# Altium PCB PCB1.PcbDoc
Units mil, origin at the board's own origin, x right, y up, seen from the top; angles counter-clockwise.
Board outline 6000 x 4000 mil, 2 copper layers (Top Layer, Bottom Layer); 9 components, 11 nets, 29 pads, 0 vias.
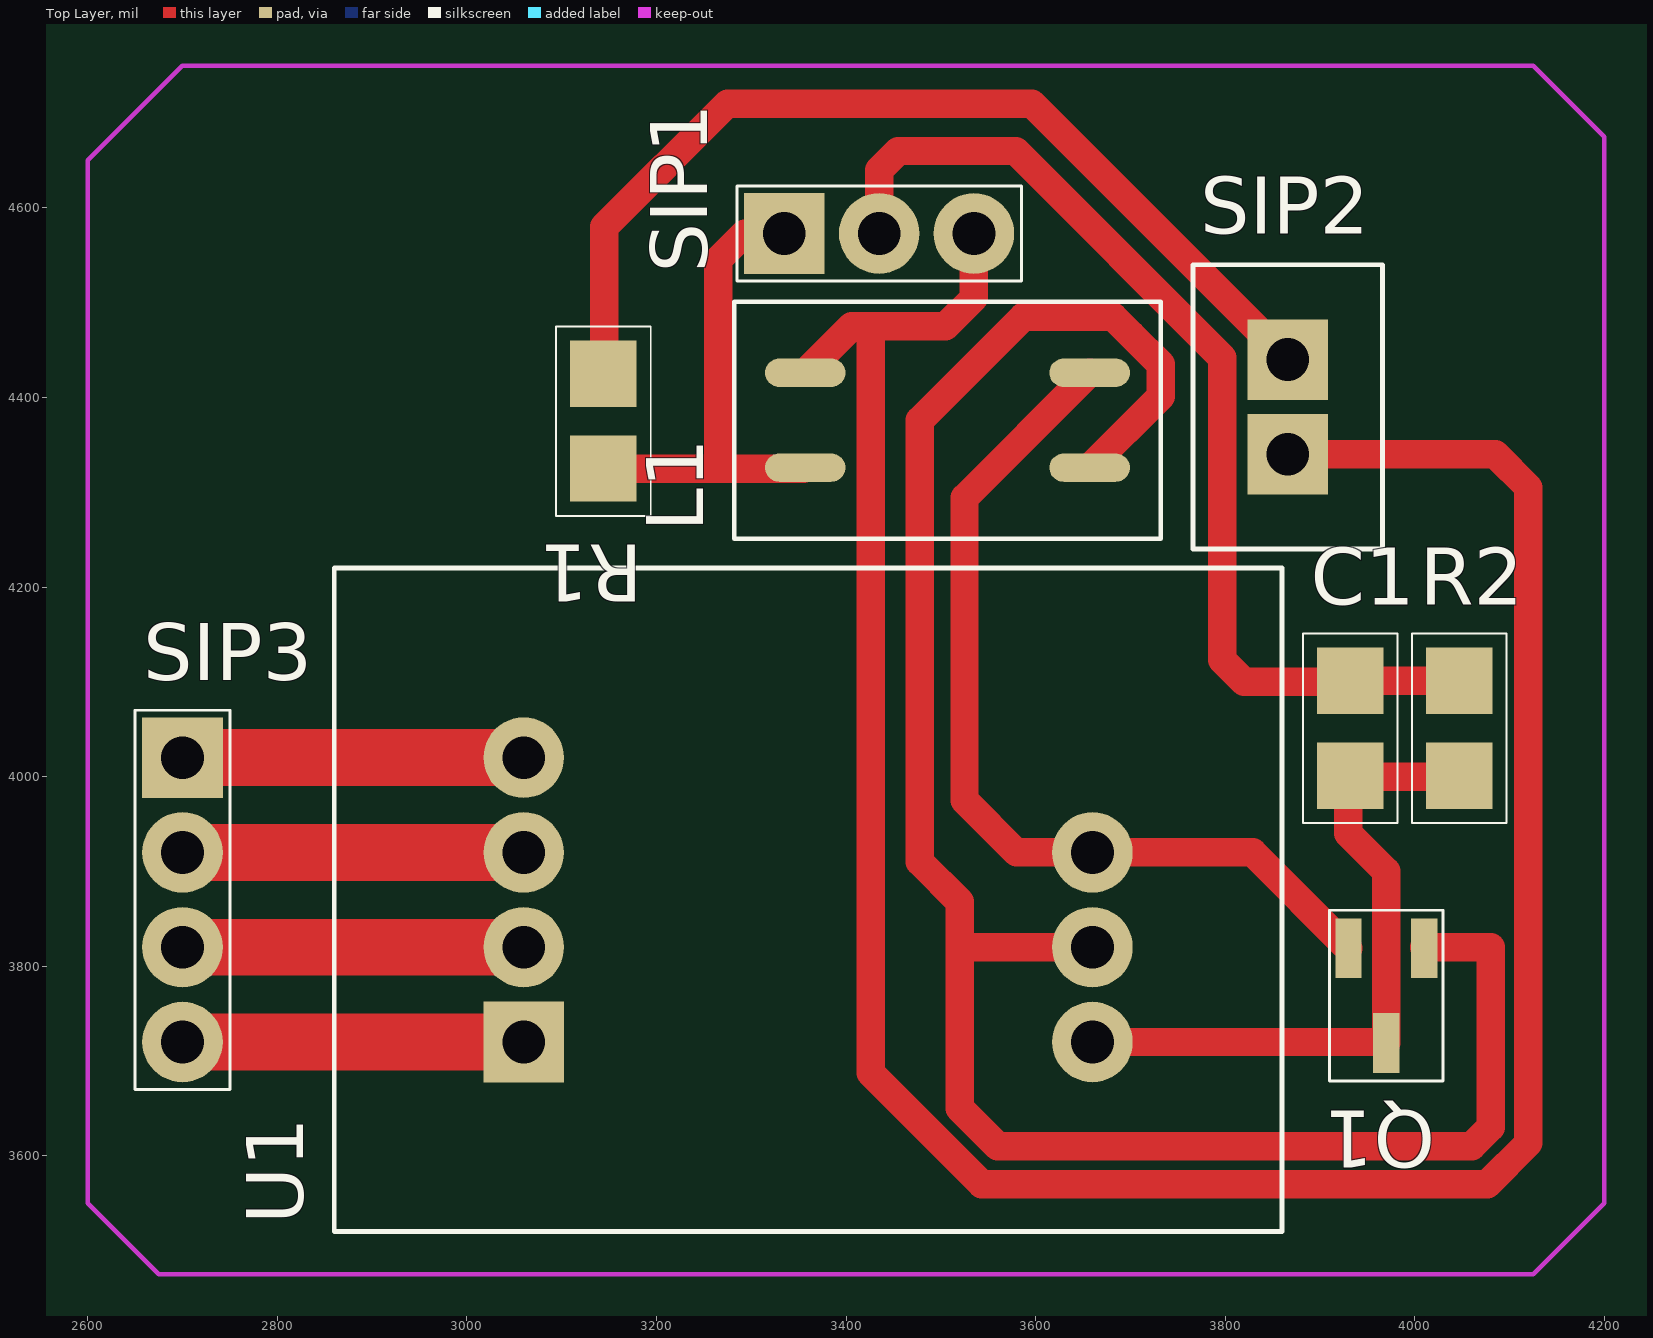
[diagram p0: Top Layer view]
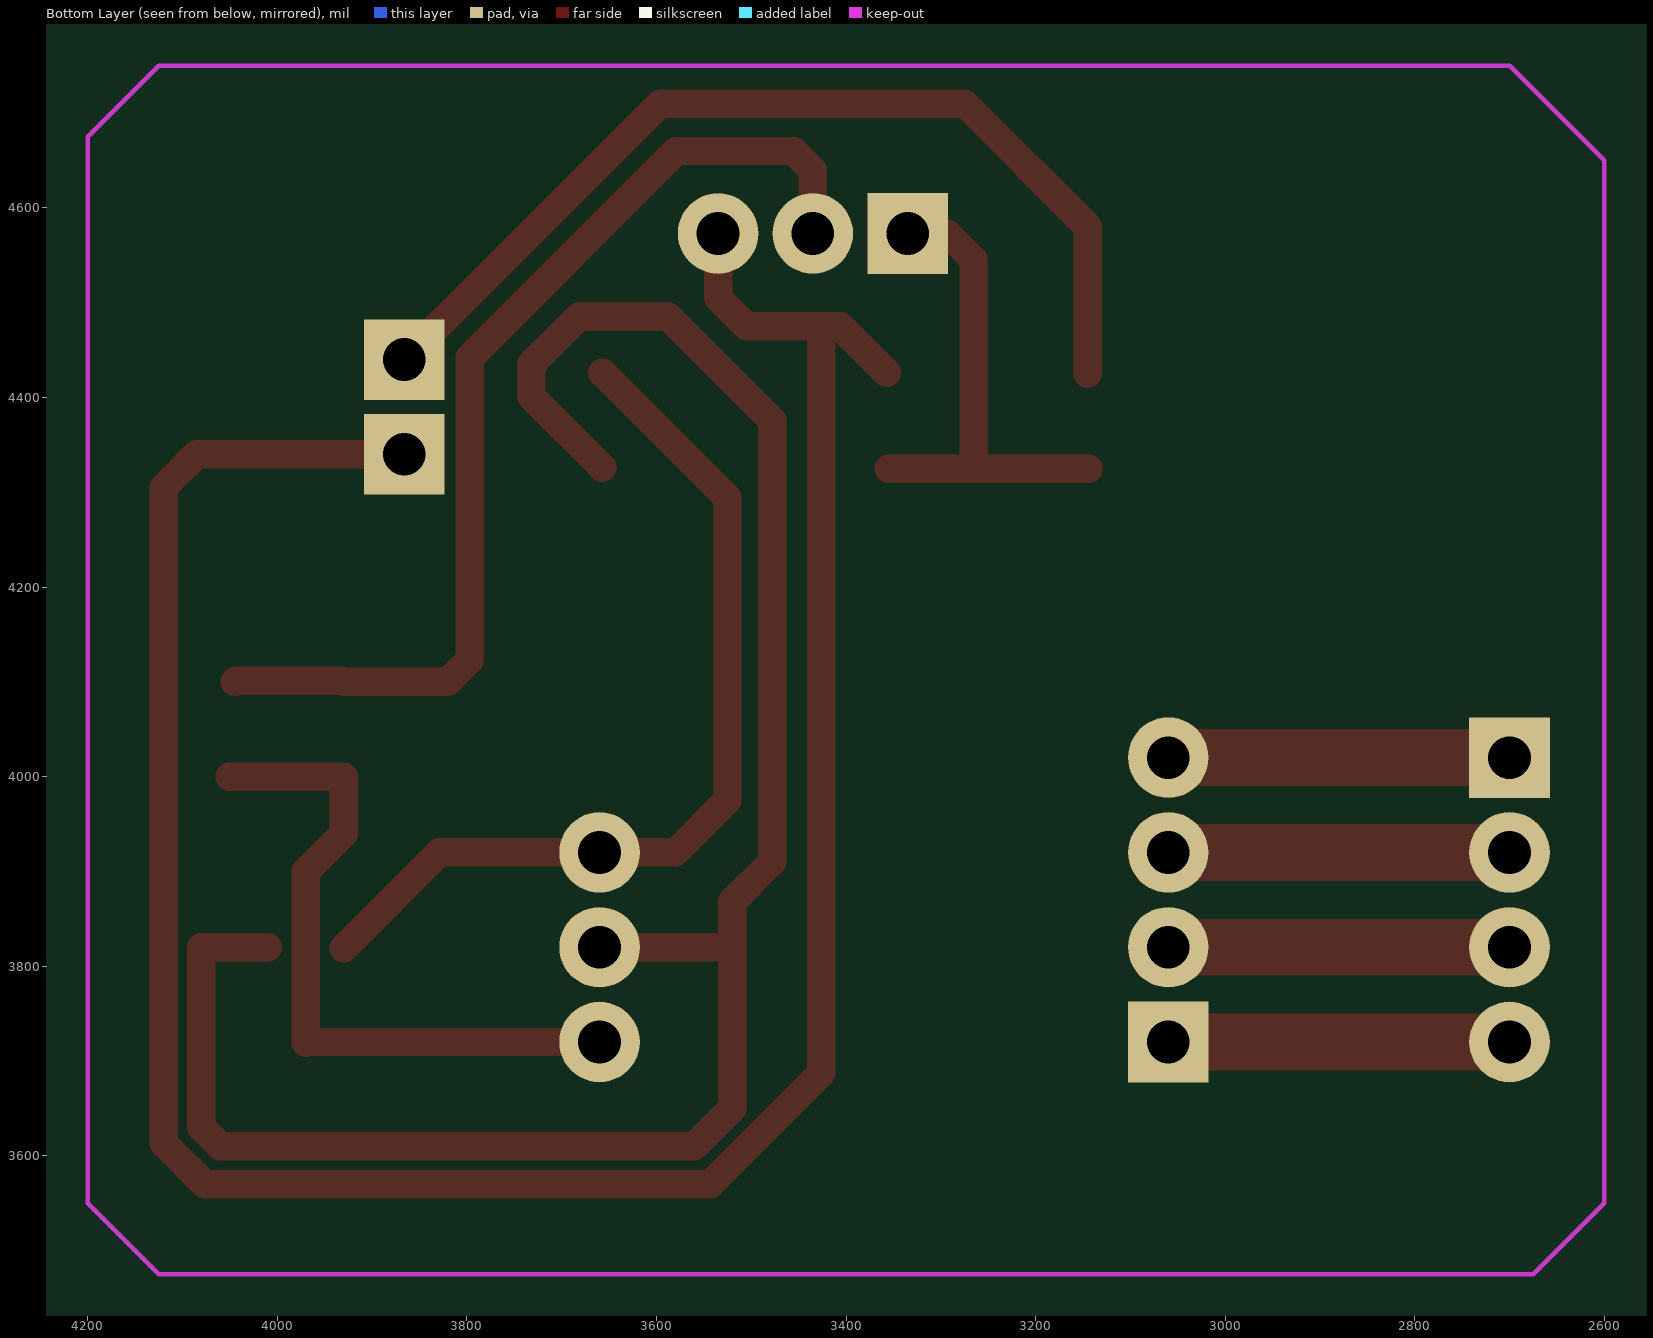
[diagram p1: Bottom Layer view, seen from below]

## Layer stack, top to bottom
Top Layer: signal copper 1.4
Dielectric: dielectric 12.6, FR-4, Dk 4.8
Bottom Layer: signal copper 1.4

## Board outline
1000,1000 7000,1000 7000,5000 1000,5000

## Design rules (kind name [scope] priority, off if disabled: settings)
Clearance [All] p1: gap=10
PolygonConnect [All] p1: connectstyle=Relief reliefconductorwidth=10 reliefentries=4 polygonreliefangle="90 Angle"
RoutingVias [All] p1: holewidth=28 width=50 viastyle="Through Hole" minholewidth=28 minwidth=50 maxholewidth=28 maxwidth=50
SilkscreenOverComponentPads [All] p1: minsilkscreentomaskgap=10
SolderMaskExpansion [All] p1: expansion=4
Width [All] p1: maxlimit=100 minlimit=30 preferedwidth=50
27 further rules are at their usual default settings.

## Components (designator, comment, footprint, x,y, rotation, side; value= is the part's Value field where it differs from the comment)
C1 "102" RES-T 3932,4001 r90 top
L1 "B82793" B82793 3657,4326 r180 top
Q1 "SI2302" SI2302 3970,3769 r180 top
R1 "120" RES-T 3144,4425 r270 top
R2 "1M" RES-T 4047,4001 r90 top
SIP1 "SIP3" SIP3 3335,4573 r90 top
SIP2 "SIP2" SIP2 3866,4340 r90 top
SIP3 "SIP4" SIP4 2700,4020 r0 top
U1 "CTM8251T" CTM8251T 3660,3720 r180 top

## Footprints (in the part's own frame and the unit in brackets; to place one, negate y for a bottom-side part, rotate by r counter-clockwise, add the part's x,y. Pads: shape width x height; smd on the part's side, far side on the other; paste and mask are expansions set on the pad)
B82793 [mil]
  oval 85x30 smd: 1(0,0) 2(0,-100) 3(300,0) 4(300,-100)
  silkscreen extent -75,-175 375,75
CTM8251T [mil]
  rect 85x85 hole 45: 1(600,0)
  round 85 hole 45: 2(600,-100) 3(600,-200) 4(600,-300) 6(0,-200) 7(0,-100) 8(0,0)
  silkscreen extent -200,-500 800,200
RES-T [mil]
  rect 70x70 smd: 1(0,0) 2(100,0)
  silkscreen extent -50,-50 150,50
SI2302 [mm] "SOT23, 3-Leads, Body 3.0x2.6mm (max), Pitch 0.90mm, IPC Medium Density"
  rect 0.7x1.6 smd: 1(-1.016,-1.27) 2(1.016,-1.27) 3(0,1.27)
  silkscreen extent -1.52,-2.29 1.52,2.29
SIP2 [mil]
  rect 85x85 hole 45: 1(0,0) 2(100,0)
  silkscreen extent -100,-100 200,100
SIP3 [mil]
  rect 85x85 hole 45: 1(0,0)
  round 85 hole 45: 2(0,-100) 3(0,-200)
  silkscreen extent -50,-250 50,50
SIP4 [mil]
  rect 85x85 hole 45: 1(0,0)
  round 85 hole 45: 2(0,-100) 3(0,-200) 4(0,-300)
  silkscreen extent -50,-350 50,50

## Part data
C1 R1 R2: library part RES-T

## Nets (pads, with @x,y where several pads share a name; then routed paths per layer and width w, separated by ;. In a path a pad name is that pad's centre, name@x,y a point inside that pad or via, vN(x,y) a via of type N, cw(c..) or ccw(c..) an arc to the next point about the centre after c; other vN are vias at no path point)
NetC1_1: C1.1 Q1.3 R2.1 U1.8 | length 727.6
  Top Layer w30: U1.8 Q1.3@3970,3720 ; Q1.3 Q1.3@3970,3720 ; R2.1@4050,4000 3930,4000 3930,3940 3970,3900 Q1.3@3970,3720
NetC1_2: C1.2 R2.2 SIP1.2 | length 1102.5
  Top Layer w30: SIP1.2 3435,4640 3455,4660 3579,4660 3797,4442 3797,4123 3820,4100 C1.2@3930,4100 ; C1.2 4044,4101 R2.2@4045,4100
NetL1_1: L1.1 Q1.1 U1.7 | length 2189
  Top Layer w30: 3520,3818 3522,3820 U1.7 ; L1.1 3732,4401 3732,4435.07 3701.07,4466 3701,4466 3682,4485 3587,4485 3478,4376 3478,3910 3520,3868 3520,3650 3560,3610 4060,3610 4080,3630 4080,3820 Q1.1@4010,3820
NetL1_2: L1.2 Q1.2 U1.6 | length 975.3
  Top Layer w30: L1.2 3525,4294 3525,3975 3580,3920 U1.6 3829,3920 Q1.2
NetL1_3: L1.3 R1.2 SIP1.1 | length 512.6
  Top Layer w30: R1.2 3265,4325 ; SIP1.1 3293,4573 3265,4545 3265,4325 ; L1.3@3355,4325 3265,4325
NetL1_4: L1.4 SIP1.3 SIP2.1 | length 2790
  Top Layer w30: L1.4 3406,4475 3505,4475 3535,4505 SIP1.3 SIP1.3@3535,4575 ; 3426,4475 3426,3687.43 3543.43,3570 4076.57,3570 4120,3613.43 4120,4305 4085,4340 SIP2.1 SIP2.1@3865,4340
NetR1_1: R1.1 SIP2.2 | length 1041.7
  Top Layer w30: R1.1@3145,4425 3145,4580 3275,4710 3596,4710 SIP2.2
NetSIP3_1: SIP3.1 U1.4 | length 360
  Top Layer w60: SIP3.1 U1.4
NetSIP3_2: SIP3.2 U1.3 | length 360
  Top Layer w60: SIP3.2 U1.3
NetSIP3_3: SIP3.3 U1.2 | length 360
  Top Layer w60: SIP3.3 U1.2
NetSIP3_4: SIP3.4 U1.1 | length 360
  Top Layer w60: SIP3.4 U1.1

## Keep-outs
Keep-Out Layer:
  lines w5: 2600,3550 2600,4650 2700,4750 4125,4750 4200,4675 4200,3550 4125,3475 2675,3475 2600,3550